# Altium PCB Wings_SMD_Breakout_v1.0.PcbDoc (part 1 of 2)
Units mil, origin at the board's own origin, x right, y up, seen from the top; angles counter-clockwise.
Board outline 2000 x 1181.1 mil, 2 copper layers (Top Layer, Bottom Layer), stack 61.756 mil thick; 50 components, 60 nets, 214 pads, 146 vias.
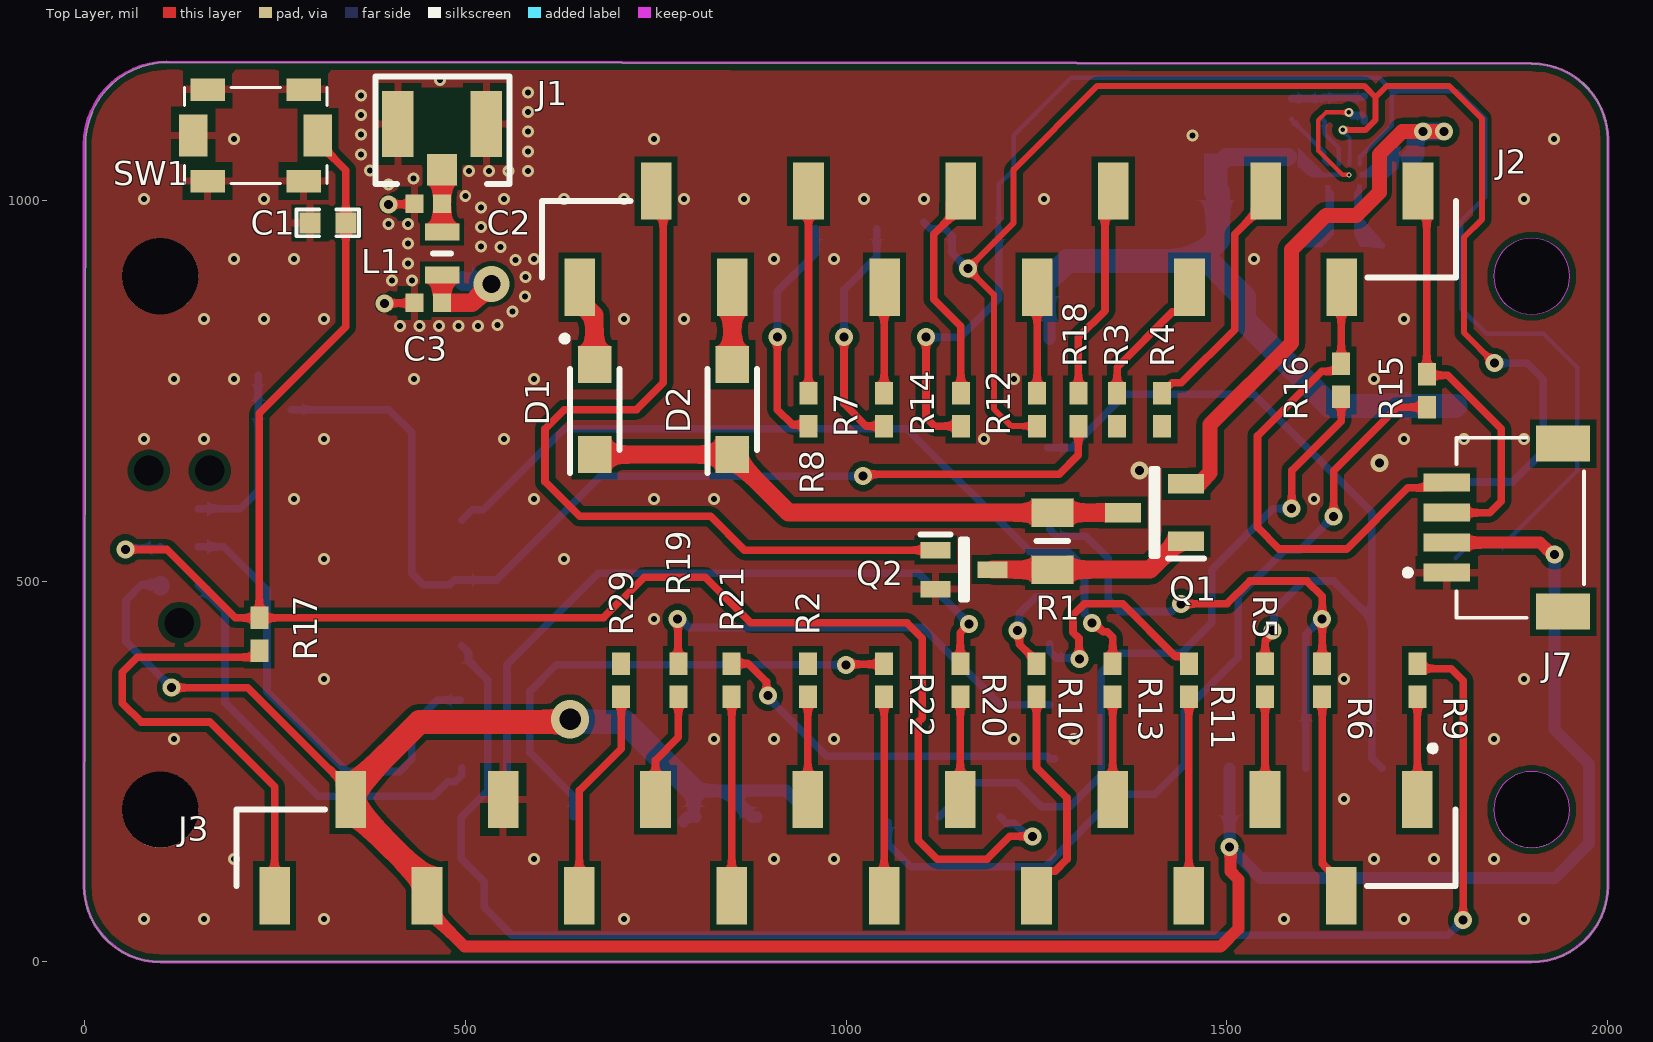
[diagram p0: Top Layer view]
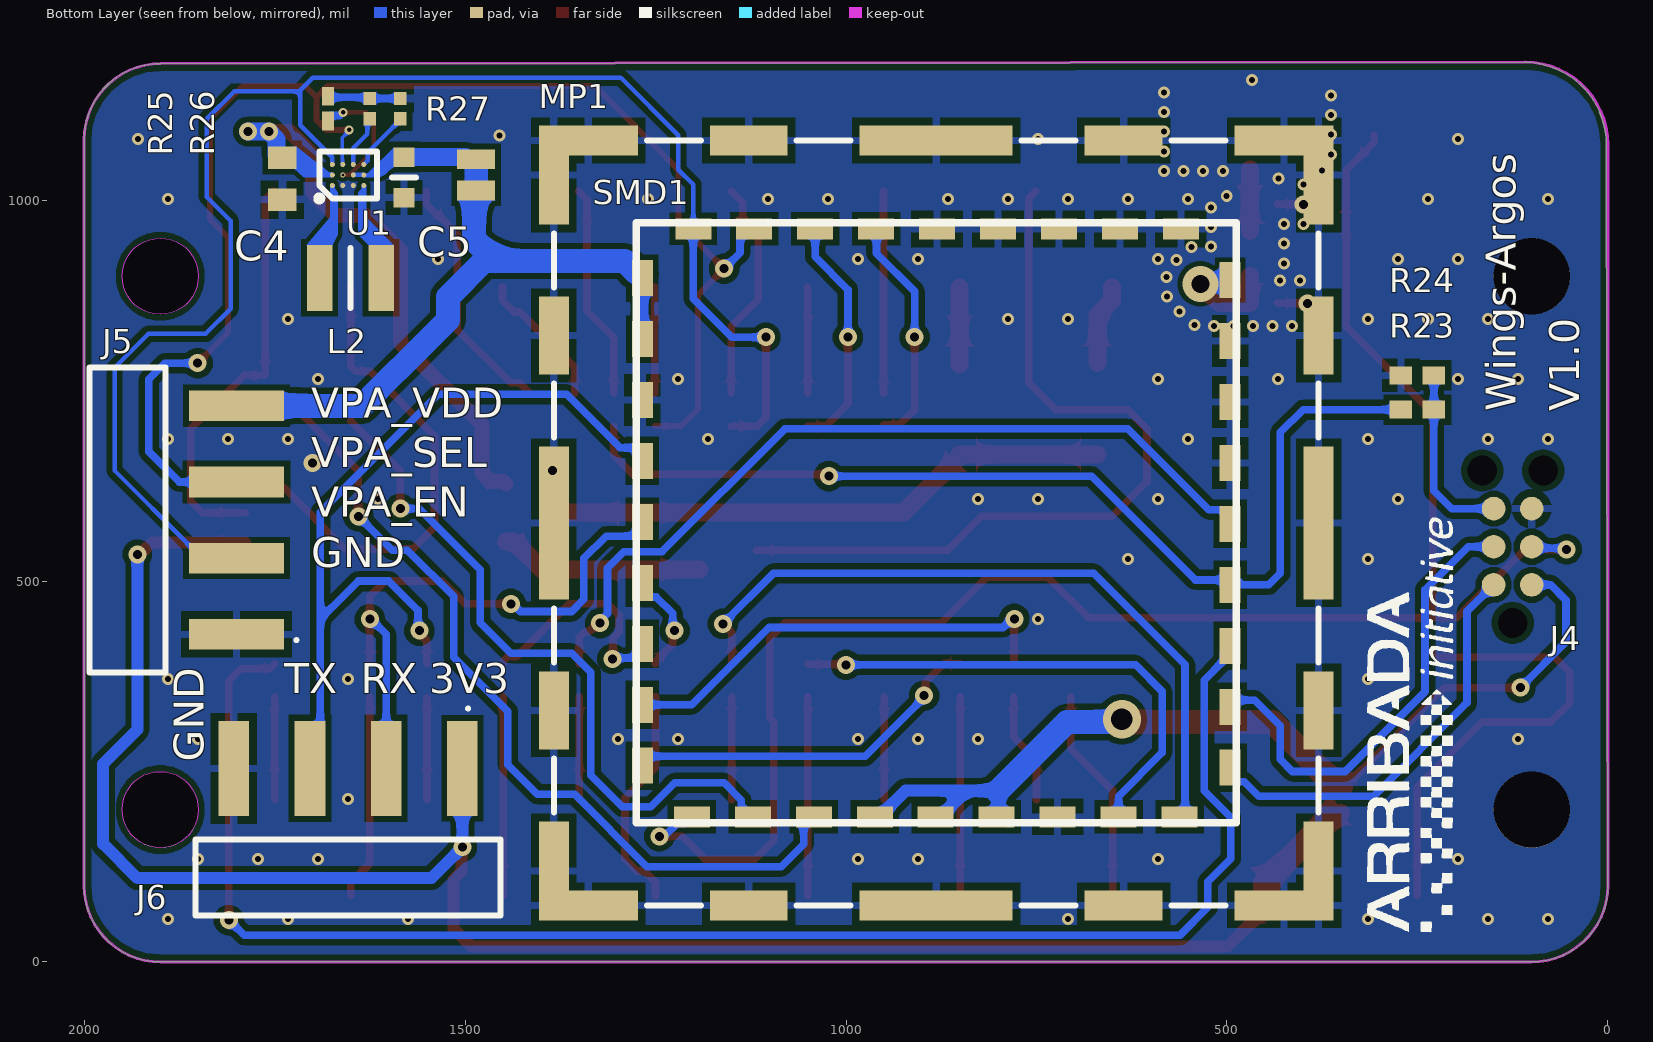
[diagram p1: Bottom Layer view, seen from below]
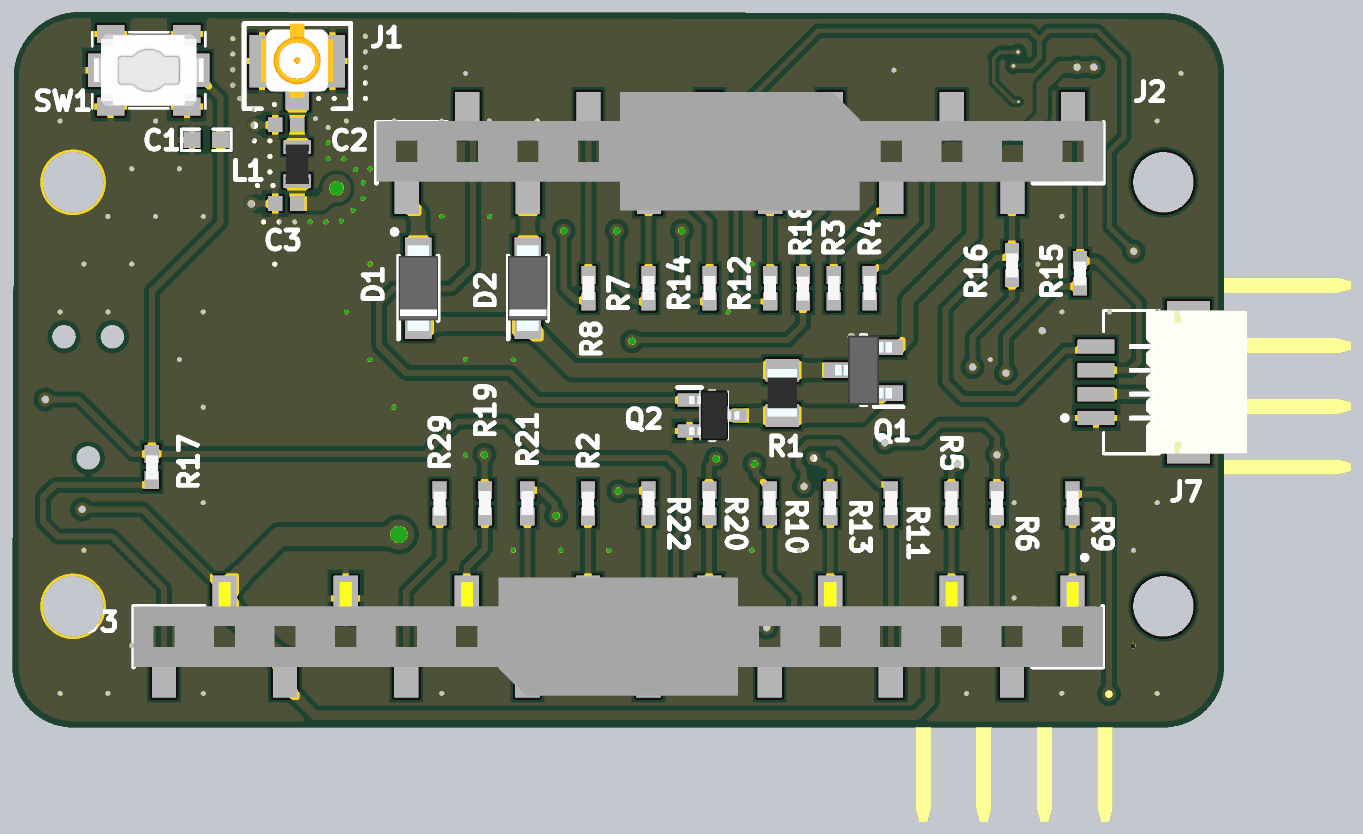
[diagram p2: 3D render of the assembled board from above, using the file's embedded part models]
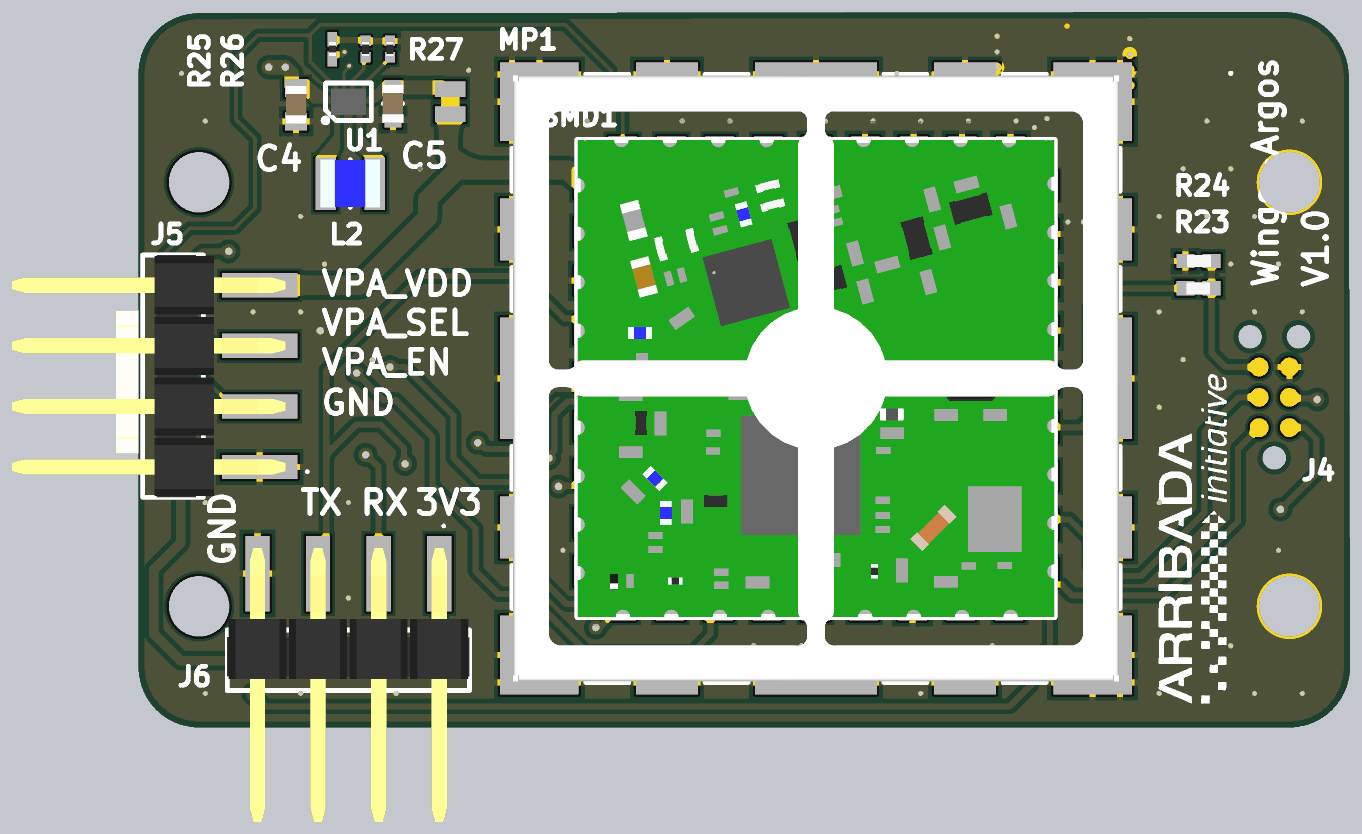
[diagram p3: 3D render of the assembled board from below, using the file's embedded part models]

## Layer stack, top to bottom
Top Solder: solder mask 1, SM-001, Dk 4
Top Layer: signal copper 1.378
Dielectric 1: core 59, Core-043, Dk 4.3
Bottom Layer: signal copper 1.378
Bottom Solder: solder mask 1, SM-001, Dk 4

## Board outline
100,0 cw(c100,100) 0,100 1.96,1072.68 cw(c110.38,1072.68) 110.38,1181.1 1900,1179.14 cw(c1900,1079.14) 2000,1079.14 2000,100 cw(c1900,100) 1900,0
cut-out: 1900,150 ccw(c1900,200) 1950,200 ccw(c1900,200) 1900,250 ccw(c1900,200) 1850,200 ccw(c1900,200)
cut-out: 1900,850 ccw(c1900,900) 1950,900 ccw(c1900,900) 1900,950 ccw(c1900,900) 1850,900 ccw(c1900,900)

## Design rules (kind name [scope] priority, off if disabled: settings)
AcuteAngle [All] p1: minimum=6.00000000000000E+0001 checktracksonly=FALSE
Clearance Clearance_1 [TouchesRoom('Room_opt') and InNet('VPA_VDD') vs TouchesRoom('Room_opt') and InNet('NetC5_1')] p1: gap=0 ignorepadtopadclearanceinfootprint=FALSE
Clearance Clearance_Pad_TPS [TouchesRoom('TPS63901')] p2: gap=5.91 ignorepadtopadclearanceinfootprint=FALSE except(10: Hole-Hole)
Clearance Clearance_RF [InNetClass('50Ohms')] p3: gap=5.91 ignorepadtopadclearanceinfootprint=FALSE
Clearance [All] p4: gap=7.87 ignorepadtopadclearanceinfootprint=FALSE except(5.91: Arc-SMDPad Track-SMDPad SMDPad-SMDPad THPad-THPad; 10: Hole-Hole)
MinimumSolderMaskSliver [All] p1: minsoldermaskwidth=3.94
PlaneClearance PlaneClearance_GND [InNet('GND')] p1: clearance=0
PlaneClearance [All] p2: clearance=20
PlaneConnect PlaneConnect_GND [InNet('GND')] p1: pad.planeconnectstyle=Relief pad.reliefexpansion=20 pad.reliefentries=4 pad.reliefconductorwidth=10 pad.reliefairgap=10 via.planeconnectstyle=Direct via.reliefexpansion=20 via.reliefentries=4 via.reliefconductorwidth=10 via.reliefairgap=10
PlaneConnect [All] p2: planeconnectstyle=Relief reliefexpansion=20 reliefentries=4 reliefconductorwidth=10 reliefairgap=10
PolygonConnect PolygonConnect_GND_TPS [(ObjectKind = 'Pad') And (Net = 'GND') And (Component = 'U1') vs InNet('GND')] p1: connectstyle=Direct reliefconductorwidth=10 reliefentries=4 polygonreliefangle="90 Angle" airgapwidth=10
PolygonConnect PolygonConnect_GND [InNet('GND') vs InNet('GND')] p2: thpad.connectstyle=Direct thpad.reliefconductorwidth=10 thpad.reliefentries=4 thpad.polygonreliefangle="90 Angle" thpad.airgapwidth=10 smdpad.connectstyle=Relief smdpad.reliefconductorwidth=10 smdpad.reliefentries=4 smdpad.polygonreliefangle="90 Angle" smdpad.airgapwidth=10 via.connectstyle=Direct via.reliefconductorwidth=10 via.reliefentries=4 via.polygonreliefangle="90 Angle" via.airgapwidth=10
PolygonConnect [All] p3: connectstyle=Relief reliefconductorwidth=10 reliefentries=4 polygonreliefangle="90 Angle" airgapwidth=10
RoomDefinition Room_opt [False vs False] p1: confinementstyle=ConfineIn formatcopy=TRUE lockcomponents=FALSE outline 1452.59,991.62 1518.33,991.62 1518.33,1074.36 1452.59,1074.36
RoomDefinition TPS63901 [False] p2: confinementstyle=ConfineIn formatcopy=TRUE lockcomponents=FALSE outline 1605,1005.43 1711.96,1005.43 1711.96,1075 1605,1075
RoutingPriority RoutingPWR [InNetClass('PWR')] p1: routingpriority=0
RoutingPriority RoutingDBG [InNetClass('UART')] p2: routingpriority=1
RoutingPriority RoutingSPI [All] p3: routingpriority=3
RoutingPriority RoutingI2C [All] p4: routingpriority=2
RoutingPriority RoutingDiGI [All] p5: routingpriority=5
RoutingPriority RoutingANALOG [All] p6: routingpriority=4
RoutingPriority RoutingALL [All] p7: routingpriority=6
RoutingVias [All] p1: holewidth=27.99 width=50 viastyle="Through Hole" minholewidth=11.81 minwidth=23.62 maxholewidth=28 maxwidth=50
ShortCircuit ShortCircuit_1 [TouchesRoom('Room_opt') and InNet('VPA_VDD') vs TouchesRoom('Room_opt') and InNet('NetC5_1')] p1: allowed=TRUE
ShortCircuit [All] p2: allowed=FALSE
SilkToSolderMaskClearance [IsPad] p1: minsilkscreentomaskgap=0 clearancetoexposedcopper=TRUE
SolderMaskExpansion SolderMaskExpansion_VIA_tented [(ObjectKind = 'Via')] p1: expansion=4 istentingtop=TRUE
SolderMaskExpansion [All] p2: expansion=4 istentingtop=FALSE
SupplyNets "Schematic Supply Nets_6" [InNet('VBAT')] p1: voltage=0.000
SupplyNets "Schematic Supply Nets_5" [InNet('GND')] p2: voltage=0.000
SupplyNets "Schematic Supply Nets_4" [InNet('VDD')] p3: voltage=0.000
SupplyNets "Schematic Supply Nets_2" [InNet('VPA_VDD')] p4: voltage=0.000
SupplyNets "Schematic Supply Nets_1" [InNet('F_3V3')] p5: voltage=0.000
SupplyNets "Schematic Supply Nets" [InNet('VBUS')] p6: voltage=0.000
Width Width_RF [InNetClass('50Ohms')] p1: maxlimit=31.5 minlimit=10 preferedwidth=23.62 minimp=50.000000 maximp=50.000000 favimp=50.000000
Width [All] p2: maxlimit=39.37 minlimit=3.94 preferedwidth=10 minimp=50.000000 maximp=50.000000 favimp=50.000000
24 further rules are at their usual default settings.

## Classes and differential pairs
net class 50Ohms: NetC2_2 NetC3_1
component class U_TPS63901: C4 C5 L2 R25 R26 R27 U1

## Components (designator, comment, footprint, x,y, rotation, side; value= is the part's Value field where it differs from the comment)
C1 "GRM155R71C104KA88D" 0402 295,970 r0 top value=100nF
C2 "NC" CAPC1005X55N 451.89,995 r0 top
C3 "CC0402BRNPO9BN3R6" CAPC1005X55N 451.89,865 r180 top value=3.6pF
C4 "GRM188R61A106MAALJ" CAPC1608X90N 1739.92,1028.07 r270 bottom value=10uF (schematic designator C1)
C5 "GRM188R61A226ME15D" GRM18x 1579.99,1029.85 r270 bottom value=22uF (schematic designator C2)
D1 "MBR120LSFT3G" SODFL3616X98N 670,725 r90 top
D2 "MBR120LSFT3G" SODFL3616X98N 850.79,725 r90 top
J1 "20279-001E-01" "MHF SMT REC" 470,1100 r270 top
J2 "SSM-112-F-SV-P-TR" SAMTEC_SSM-112-F-SV-P-TR 1200.79,948.67 r180 top
J3 "SSM-116-F-SV-P-TR" SAMTEC_SSM-116-F-SV-P-TR 1000,150 r0 top
J4 "TC2030-NL" TC2030NL 125,445 r90 bottom
J5 "M20-8890445R" M208890445R 2014.68,580 r90 bottom
J6 "M20-8890445R" M208890445R 1653.54,39.37 r0 bottom (schematic designator J7)
J7 "PRT-14417" SPARKFUN_PRT-14417 1885,570 r90 top (schematic designator J6)
L1 "LQW18AN18NG8ZD" LQW18AN10NG80D 470,930 r90 top value=18nH
L2 "DFE252012F-2R2M=P2" DFE2HCAH1R0MJ0L 1650.46,897.99 r180 bottom value=2.2uH (schematic designator L1)
MP1 "36103255S" 36103255S 881.57,576.31 r180 bottom
Q1 "DMG3415U-7" SOT96P240X120-3N 1405,589.8 r180 top
Q2 "BSS138BKW,115" SOT65P210X110-3N 1155,515 r0 top
R1 "RC0805JR07100KL" RESC2012X60N 1270.79,552.4 r270 top value=100kR
R2 "0R" RESC1005X40N 950,370 r270 top value=0mR
R3 "0R" RESC1005X40N 1355.79,725 r90 top value=0mR
R4 "0R" RESC1005X40N 1415,725 r90 top value=0mR
R5 "0R" RESC1005X40N 1550,370 r90 top value=0mR
R6 "0R" RESC1005X40N 1625,370 r90 top value=0mR
R7 "0R" RESC1005X40N 1050,725 r90 top value=0mR
R8 "0R" RESC1005X40N 950.79,725 r90 top value=0mR
R9 "0R" RESC1005X40N 1750,370 r90 top value=0mR (schematic designator R13)
R10 "0R" RESC1005X40N 1250,370 r90 top value=0mR (schematic designator R19)
R11 "0R" RESC1005X40N 1450,370 r90 top value=0mR (schematic designator R20)
R12 "0R" RESC1005X40N 1250.79,725 r90 top value=0mR (schematic designator R9)
R13 "0R" RESC1005X40N 1350,370 r90 top value=0mR (schematic designator R11)
R14 "0R" RESC1005X40N 1150.79,725 r90 top value=0mR (schematic designator R10)
R15 "0R" RESC1005X40N 1762.3,749.86 r270 top value=0mR (schematic designator R14)
R16 "0R" RESC1005X40N 1650,763.31 r270 top value=0mR
R17 "0R" RESC1005X40N 230,430 r270 top value=0mR
R18 "0R" RESC1005X40N 1305,725 r270 top value=0mR (schematic designator R12)
R19 "0R" RESC1005X40N 780,370 r90 top value=0mR (schematic designator R21)
R20 "0R" RESC1005X40N 1150,370 r90 top value=0mR (schematic designator R15)
R21 "0R" RESC1005X40N 850,370 r90 top value=0mR (schematic designator R22)
R22 "0R" RESC1005X40N 1050,370 r90 top value=0mR (schematic designator R18)
R23 "0R" RESC1005X40N 250,725 r0 bottom value=0mR
R24 "0R" RESC1005X40N 250,770 r180 bottom value=0mR
R25 "CRCW020136K5FNED" RESC0603X28N 1680,1120 r90 bottom value=36.5KR (schematic designator R1)
R26 "RC0201FR-070RL" RESC0603X26N 1625,1120 r90 bottom value=0R (schematic designator R2)
R27 "RC0201FR-070RL" RESC0603X26N 1585,1120 r90 bottom value=0R (schematic designator R3)
R29 "0R" RESC1005X40N 705,370 r270 top value=0mR (schematic designator R25)
SMD1 "stm32wl-SMD" stm32wl-SMD_noLegs 1275.28,182.6 r180 bottom
SW1 "PTS820J2x" TL1015 225,1085 r0 top
U1 "TPS63901YCJR" BGA12C35P3X4_111X146X35 1653.57,1032.99 r90 bottom

## Footprints (in the part's own frame and the unit in brackets; to place one, negate y for a bottom-side part, rotate by r counter-clockwise, add the part's x,y. Pads: shape width x height; smd on the part's side, far side on the other; paste and mask are expansions set on the pad)
0402 [mm]
  rect 0.7x0.7 smd: 1(0.035,0) 2(1.233,0)
  silkscreen extent -0.41,-0.45 1.67,0.45, body extent -0.38,-0.36 1.65,0.36, height 0.82
36103255S [mm] "Shielding Cabinet, SMD Frame, 25.4x25.4mm"
  rect 1x3.3 smd: 1(-12.75,-11.6) 1(-12.75,11.6) 1(12.75,-11.6) 1(12.75,11.6)
  rect 1x2.6 smd: 1(-12.75,-6.25) 1(-12.75,6.25) 1(12.75,-6.25) 1(12.75,6.25)
  rect 1x5.1 smd: 1(-12.75,0) 1(12.75,0)
  rect 3.3x1 smd: 1(-11.6,-12.75) 1(-11.6,12.75) 1(11.6,-12.75) 1(11.6,12.75)
  rect 2.6x1 smd: 1(-6.25,-12.75) 1(-6.25,12.75) 1(6.25,-12.75) 1(6.25,12.75)
  rect 5.1x1 smd: 1(0,-12.75) 1(0,12.75)
  silkscreen extent -12.75,-12.75 12.75,12.75, body extent -12.7,-12.7 12.7,12.7, height 3.2
BGA12C35P3X4_111X146X35 [mm]
  round 0.169 smd: A1(-0.35,0.525) A2(0,0.525) A3(0.35,0.525) B1(-0.35,0.175) B2(0,0.175) B3(0.35,0.175) C1(-0.35,-0.175) C2(0,-0.175) C3(0.35,-0.175) D1(-0.35,-0.525) D2(0,-0.525) D3(0.35,-0.525)
  silkscreen extent -0.88,-0.96 0.78,1.06, body extent -0.56,-0.73 0.56,0.73, height 0.35
CAPC1005X55N [mm]
  rect 0.6x0.62 smd: 1(-0.46,0) 2(0.46,0)
  body extent -0.5,-0.25 0.5,0.25, height 0.55
CAPC1608X90N [mm]
  rect 0.75x0.94 smd: 1(-0.7,0) 2(0.7,0)
  body extent -0.8,-0.45 0.8,0.45, height 0.8
DFE2HCAH1R0MJ0L [mm]
  rect 0.85x2.2 smd: 1(-1.025,0) 2(1.025,0)
  silkscreen extent 0,-1 0,1, body extent -1.25,-1 1.25,1, height 1.2
GRM18x [mm]
  rect 0.65x0.7 smd: 1(-0.675,0) 2(0.675,0)
  silkscreen extent 0,-0.4 0,0.4, body extent -0.8,-0.45 0.8,0.45, height 0.8
LQW18AN10NG80D [mm]
  rect 0.57x1.15 smd: 1(-0.715,0) 2(0.715,0)
  silkscreen extent 0,-0.3 0,0.3, body extent -0.82,-0.5 0.82,0.5, height 0.9
M208890445R [mm]
  rect 1.02x3.17 smd: 1(-3.81,-5.453) 2(-1.27,-5.453) 3(1.27,-5.453) 4(3.81,-5.453)
  silkscreen extent -5.08,-7.5 5.08,-0.55, body extent -5.08,-6.54 5.08,4.96, height 2.5
"MHF SMT REC" [mm]
  rect 1.05x1 smd: 1(1.525,0)
  rect 2.2x1.05 smd: 2(0,1.475) 3(0,-1.475)
  Top Layer pour cut-out: -1.2,0.95 1,0.95 1,-0.95 -1.2,-0.95
  silkscreen extent -1.58,-2.22 2,2.25, body extent -1.57,-1.5 1.53,1.5, height 1.27
RESC0603X26N [mm]
  rect 0.44x0.42 smd: 1(-0.34,0) 2(0.34,0)
  body extent -0.3,-0.15 0.3,0.15, height 0.26
RESC0603X28N [mm]
  rect 0.625x0.4 smd: 1(-0.412,0) 2(0.412,0)
  body extent -0.3,-0.15 0.3,0.15, height 0.28
RESC1005X40N [mm]
  rect 0.75x0.6 smd: 1(-0.55,0) 2(0.55,0)
  body extent -0.49,-0.25 0.51,0.25, height 0.35
RESC2012X60N [mm]
  rect 0.95x1.4 smd: 1(-0.95,0) 2(0.95,0)
  silkscreen extent 0,-0.53 0,0.53, body extent -1,-0.63 1,0.63, height 0.6
SAMTEC_SSM-112-F-SV-P-TR [mm]
  rect 1.02x1.905 smd: 01(13.97,1.603) 02(11.43,-1.603) 03(8.89,1.603) 04(6.35,-1.603) 05(3.81,1.603) 06(1.27,-1.603) 07(-1.27,1.603) 08(-3.81,-1.603) 09(-6.35,1.603) 10(-8.89,-1.603) 11(-11.43,1.603) 12(-13.97,-1.603)
  silkscreen extent -15.24,-1.27 15.24,3.41, body extent -15.24,-2.54 15.24,2.41, height 8.64
SAMTEC_SSM-116-F-SV-P-TR [mm]
  rect 1.02x1.905 smd: 01(19.05,1.603) 02(16.51,-1.603) 03(13.97,1.603) 04(11.43,-1.603) 05(8.89,1.603) 06(6.35,-1.603) 07(3.81,1.603) 08(1.27,-1.603) 09(-1.27,1.603) 10(-3.81,-1.603) 11(-6.35,1.603) 12(-8.89,-1.603) 13(-11.43,1.603) 14(-13.97,-1.603) 15(-16.51,1.603) 16(-19.05,-1.603)
  silkscreen extent -20.32,-1.27 20.32,3.41, body extent -20.32,-2.48 20.32,2.48, height 8.64
SODFL3616X98N [mm]
  rect 1.24x1.12 smd: 1(-1.5,0) 2(1.5,0)
  silkscreen extent -2.12,-0.82 1.35,0.82, body extent -1.8,-0.82 1.8,0.82, height 0.98
SOT65P210X110-3N [mm]
  rect 1x0.55 smd: 1(-0.95,0.65) 2(-0.95,-0.65) 3(0.95,0)
  silkscreen extent -1.45,-1 0.1,1.17, body extent -0.96,-1.05 1.14,1.05, height 0.93
SOT96P240X120-3N [mm]
  rect 1.2x0.65 smd: 1(-1.05,0.96) 2(-1.05,-0.96) 3(1.05,0)
  silkscreen extent -1.65,-1.45 0.1,1.54, body extent -1.2,-1.45 1.2,1.45, height 1.2
SPARKFUN_PRT-14417 [mm]
  rect 0.6x1.55 smd: 1(-1.5,2.45) 2(-0.5,2.45) 3(0.5,2.45) 4(1.5,2.45)
  rect 1.2x1.8 smd: S1(-2.8,-1.425) S2(2.8,-1.425)
  silkscreen extent -3,-2.12 3,3.85, body extent -3,-3.9 3,1.05, height 3.25
stm32wl-SMD_noLegs [mm]
  rect 0.7x1.2 smd: 0(0.2,1.905) 1(0.2,3.937) 2(0.2,5.969) 3(0.2,8.001) 4(0.2,10.033) 5(0.2,12.065) 6(0.2,14.097) 7(0.2,16.129) 8(0.2,18.161) 18(19.8,18.095) 19(19.8,16.063) 20(19.8,14.031) 21(19.8,11.999) 22(19.8,9.967) 23(19.8,7.935) 24(19.8,5.903) 25(19.8,3.871) 26(19.8,1.839)
  rect 1.2x0.7 smd: 9(1.9,19.8) 10(3.932,19.8) 11(5.964,19.8) 12(7.996,19.8) 13(10.028,19.8) 14(12.06,19.8) 15(14.092,19.8) 16(16.124,19.8) 17(18.156,19.8) 27(18.111,0.2) 28(16.079,0.2) 29(14.047,0.2) 30(12.015,0.2) 31(9.983,0.2) 32(7.951,0.2) 33(5.919,0.2) 34(3.887,0.2) 35(1.855,0.2)
  silkscreen extent 0,0 20,20, body extent 0,0 20,20, height 2.05
TC2030NL [mm]
  round 0.787 smd paste-0.787: 1(1.27,-0.635) 2(1.27,0.635) 3(2.54,-0.635) 4(2.54,0.635) 5(3.81,-0.635) 6(3.81,0.635)
  round 0.65 hole 0.991 unplated: H1(0,0) H2(5.08,1.016) H3(5.08,-1.016)
TL1015 [mm]
  rect 0.95x1.4 smd: 1(-2.075,0) 2(2.075,0)
  rect 1.15x0.75 smd: G1(-1.6,1.525) G2(1.6,1.525) G3(1.6,-1.525) G4(-1.6,-1.525)
  silkscreen extent -2.37,-1.6 2.37,1.6, body extent -2.3,-1.5 2.3,1.5, height 2

## Part data
C1: "Multilayer Ceramic Capacitors MLCC - SMD/SMT 0.1 uF 16 VDC 10% 0402 X7R", Capacitance=100nF, Case Code (Imperial)=0402, Case Code (Metric)=1005, Dielectric=X7R, Dielectric Material=Ceramic, Manufacturer=YAGEO, Manufacturer 1=Murata, Manufacturer_Part_Number=CC0402KRX7R7BB104, Max Operating Temperature=125°C, Min Operating Temperature=-55°C, Package=C0402, Package Quantity=1, Supplier Part Number 1=81-GRM155R71C104KA88, Tolerance=10%, Voltage=16V, Case/Package=0402, Category 1="Ceramic Capacitors", ComponentLink1Description=https://datasheet.ciiva.com/129/grm155r71c104ka88-01-129739.pdf?src-supplier=Digi-Key, ComponentLink1URL=https://datasheet.ciiva.com/129/grm155r71c104ka88-01-129739.pdf?src-supplier=Digi-Key, ComponentLink2Description=https://datasheet.ciiva.com/129/grm155r71c104ka88-01-129740.pdf?src-supplier=Digi-Key, ComponentLink2URL=https://datasheet.ciiva.com/129/grm155r71c104ka88-01-129740.pdf?src-supplier=Digi-Key, ComponentLink3Description=https://datasheet.ciiva.com/29199/454098-da-01-en-vs-kondensator-0402-29199799.pdf?src-supplier=Conrad, ComponentLink3URL=https://datasheet.ciiva.com/29199/454098-da-01-en-vs-kondensator-0402-29199799.pdf?src-supplier=Conrad, ComponentLink4Description=https://datasheet.ciiva.com/7937/4360-7937615.pdf?src-supplier=Element14, ComponentLink4URL=https://datasheet.ciiva.com/7937/4360-7937615.pdf?src-supplier=Element14, ComponentLink5Description=https://datasheet.ciiva.com/14116/grmseries-highdielectrictype-eng-14116878.pdf?src-supplier=Distrelec, ComponentLink5URL=https://datasheet.ciiva.com/14116/grmseries-highdielectrictype-eng-14116878.pdf?src-supplier=Distrelec, ComponentLink6Description=https://datasheet.ciiva.com/14103/grmseries-highdielectrictype-eng-14103750.pdf?src-supplier=Distrelec, ComponentLink6URL=https://datasheet.ciiva.com/14103/grmseries-highdielectrictype-eng-14103750.pdf?src-supplier=Distrelec, ComponentLink7Description=https://datasheet.ciiva.com/28534/4360-28534127.pdf?src-supplier=Element14, ComponentLink7URL=https://datasheet.ciiva.com/28534/4360-28534127.pdf?src-supplier=Element14, ComponentLink8Description=https://datasheet.ciiva.com/28534/4360-28534133.pdf?src-supplier=Element14, ComponentLink8URL=https://datasheet.ciiva.com/28534/4360-28534133.pdf?src-supplier=Element14, Depth=0.5mm, Description 1="0402 0.1 uF 16V ±10 % Tolerance X7R SMT Multilayer Ceramic Capacitor", Height=0.5mm, Lead Free="Lead Free", Length=1mm, Manufacturer Part Number 1=GRM155R71C104KA88D, Material=Ceramic, Mount="Surface Mount", Number of Pins=2, Packaging="Tape and Reel", Pricing 1="1=0,1, 10=0,017, 50=0,017, 100=0,01, 1000=0,008, 10000=0,005 (USD)", Radiation Hardening=No, Reach SVHC Compliant=Unknown, RoHS 1=Yes, RoHS Compliant=Yes, Series=GRM, Stock 1=7816691, Supplier 1=Mouser, Termination=SMD/SMT, Thickness=0.022inch, Voltage Rating=16V, Voltage Rating (DC)=16V, Width=0.02inch
C2: library part GEN_CAP_0402, "Generic capacitor", ComponentLink1Description=Mouser, ComponentLink1URL=https://www.mouser.fr/ProductDetail/Murata-Electronics/GCM1555C1H4R7CA16D?qs=jDWTHf1mkXZYnVNtgyfFgw%3D%3D
C3: "Multilayer Ceramic Capacitors MLCC - SMD/SMT 50 V 3.6pF C0G 0402 Tol 0.1pF", Manufacturer_Name=KEMET, Mouser Part Number=603-CC402BRNPO9BN3R6, Arrow Part Number=CC0402BRNPO9BN3R6, Arrow Price/Stock=https://www.arrow.com/en/products/cc0402brnpo9bn3r6/yageo, Datasheet Link=https://www.yageo.com/upload/media/product/productsearch/datasheet/mlcc/UPY-GP_NP0_16V-to-50V_18.pdf, Height=0.55mm, Manufacturer_Part_Number=CC0402BRNPO9BN3R6, Mouser Price/Stock=https://www.mouser.co.uk/ProductDetail/Yageo/CC0402BRNPO9BN3R6?qs=57cj7OiSijl%2FHGuB4N4%2Few%3D%3D
C4: "Multilayer Ceramic Capacitors MLCC - SMD/SMT 10 uF 10 VDC 20% 0603 X5R", Manufacturer_Name="Murata Electronics", Mouser Part Number=81-GRM188R61A106MALJ, Arrow Part Number=GRM188R61A106MAALJ, Arrow Price/Stock=https://www.arrow.com/en/products/grm188r61a106maalj/murata-manufacturing, Datasheet Link=https://psearch.en.murata.com/capacitor/product/GRM188R61A106MAAL%23.html, Height=0.9mm, Manufacturer_Part_Number=GRM188R61A106MAALJ, Mouser Price/Stock=https://www.mouser.co.uk/ProductDetail/Murata-Electronics/GRM188R61A106MAALJ?qs=hNud%2FORuBR0Lq8imX%2F1lYQ%3D%3D
C5: "Multilayer Ceramic Capacitors MLCC - SMD/SMT 22 uF 10 VDC 20% 0603 X5R", Manufacturer_Name="Murata Electronics", Mouser Part Number=81-GRM188R61A226ME5D, Arrow Part Number=GRM188R61A226ME15D, Arrow Price/Stock=https://www.arrow.com/en/products/grm188r61a226me15d/murata-manufacturing?region=nac, Datasheet Link=https://search.murata.co.jp/Ceramy/image/img/A01X/G101/ENG/GRM188R61A226ME15-02A.pdf, Height=0.8mm, Manufacturer_Part_Number=GRM188R61A226ME15D, Mouser Price/Stock=https://www.mouser.co.uk/ProductDetail/Murata-Electronics/GRM188R61A226ME15D?qs=eeBpzGFlv%252B8DV%2FrilzyhAw%3D%3D
D1 D2: "Schottky Diodes & Rectifiers 1A 20V", Manufacturer_Name=onsemi, Mouser Part Number=863-MBR120LSFT3G, Arrow Part Number=MBR120LSFT3G, Arrow Price/Stock=https://www.arrow.com/en/products/mbr120lsft3g/on-semiconductor?region=nac, Datasheet Link=http://www.onsemi.com/pub/Collateral/MBR120LSFT1-D.PDF, Height=0.98mm, Manufacturer_Part_Number=MBR120LSFT3G, Mouser Price/Stock=https://www.mouser.co.uk/ProductDetail/onsemi/MBR120LSFT3G?qs=3JMERSakebrl0QzFyBgvHg%3D%3D
J1: "CON IPEX MHF SMT RECEPTACLE RF DC - 6GHZ VSWR: 1.3 max. at 0.1-3GHz; VSWR: 1.5 max. at 3-6GHz", Frequency Range="DC - 6GHz", Manufacturer=Taoglas, Manufacturers Part Number=RECE-20279-001E-01, Supplier Part Number 1=931-1107-1-ND, Distributor 1=EBV, Distributor 2="Future Electronics", Size=MHF, Supplier 1=Digi-Key, Supplier 2=Mouser, Supplier Part Number 2=960-RECE20279001E01
J2: "Headers & Wire Housings Surface Mount, 12pos, PCB Socket Strips, .100\" pitch"
J3: "Headers & Wire Housings Surface Mount, 16pos,  PCB Socket Strips, .100\" pitch", Supplier Part Number 1=SSM-116-F-SV-P-ND, Supplier 1=Digi-Key, Supplier 2=Digi-Key, Supplier Part Number 2=SSM-116-F-SV-ND
J4: "CON PLUG OF NAILS 6 PIN FOOTPRINT NO LEGS", Manufacturer=Tag-Connect, Manufacturers Part Number="NOT FITTED PART", Distributor 1=EBV, Distributor 2="Future Electronics", Supplier Part Number 1="NOT FITTED PART", Supplier Part Number 2="NOT FITTED PART"
J5 J6: "Connector", Manufacturer_Name=Harwin, Mouser Part Number=855-M20-8890445R, Datasheet Link=https://cdn.harwin.com/pdfs/M20-889.pdf, Height=2.65mm, Manufacturer_Part_Number=M20-8890445R, Mouser Price/Stock=https://www.mouser.co.uk/ProductDetail/Harwin/M20-8890445R?qs=k41KVqW3ymoiw3ZBsQPrmw%3D%3D
J7: "QWIIC JST CONNECTOR - SMD 4-PIN", Package=None, Check_prices=https://www.snapeda.com/parts/PRT-14417/SparkFun+Electronics/view-part/?ref=eda, MF="SparkFun Electronics", MP=PRT-14417, SnapEDA_Link=https://www.snapeda.com/parts/PRT-14417/SparkFun+Electronics/view-part/?ref=snap
L1: "Inductor Wirewound , 18 nH, 75 Milliohm, ± 2%, 1.4 A, 0603 [1608 Metric]", Supplier Part Number 1=81-LQW18AN18NG8ZD, Supplier 1=Mouser
L2: "Inductor Power Chip Shielded Wirewound 2.2uH 20% 1MHz Metal 2.3A 0.082Ohm DCR 1008 T/R", Manufacturer=Murata, Manufacturer Part Number=DFE252012F-2R2M=P2, Supplier Part Number 1=81-DFE252012F-2R2MP2, Category="Fixed Inductors", ComponentLink1Description=http://www.farnell.com/datasheets/2616790.pdf?src-supplier=Farnell, ComponentLink1URL=http://www.farnell.com/datasheets/2616790.pdf?src-supplier=Farnell, ComponentLink2Description=https://www.murata.com/~/media/webrenewal/products/inductor/chip/tokoproducts/wirewoundmetalalloychiptype/m_dfe252012f.ashx?src-supplier=Digikey, ComponentLink2URL=https://www.murata.com/~/media/webrenewal/products/inductor/chip/tokoproducts/wirewoundmetalalloychiptype/m_dfe252012f.ashx?src-supplier=Digikey, ComponentLink3Description=https://datasheet.octopart.com/DFE252012F-2R2M%3DP2-Murata-datasheet-117010004.pdf?src-supplier=Future+Electronics, ComponentLink3URL=https://datasheet.octopart.com/DFE252012F-2R2M%3DP2-Murata-datasheet-117010004.pdf?src-supplier=Future+Electronics, ComponentLink4Description=https://datasheet.octopart.com/DFE252012F-2R2M%3DP2-Murata-datasheet-142691300.pdf?src-supplier=Arrow.cn, ComponentLink4URL=https://datasheet.octopart.com/DFE252012F-2R2M%3DP2-Murata-datasheet-142691300.pdf?src-supplier=Arrow.cn, Pricing 1="1=0,34, 10=0,221, 50=0,221, 100=0,208, 1000=0,208, 10000=0,176 (USD)", RoHS=Yes, Stock 1=84662, Supplier 1=Mouser
MP1: "WE-SHC Shielding Cabinet, SMT Frame, Tin Plated, Tray, 25x25x3mm", Manufacturer="Wurth Elektronik", Operating Temperature Max=125°C, Operating Temperature Min=-40°C, Base Material=Steel, Category="EMC Shielding", ComponentLink1Description="Website Link", ComponentLink1URL=https://www.we-online.com/redexpert/article/36103255S?ad, ComponentLink2Description="Datasheet Link", ComponentLink2URL=https://www.we-online.com/redexpert/spec/36103255S?ad, Height=3mm, Length=25mm, Manufacturer Part Number=36103255S, Match Code=WE-SHC, Mount="Surface Mount", Packaging=Tray, Plating="Tin Plated", type="SMT Frame", Width=25mm
Q1: "MOSFET (P-Channel) 16V Enh FET 8Vgss -12A 0.65W", Manufacturer_Name="Diodes Inc.", Mouser Part Number=621-DMG3415U-7, Arrow Part Number=DMG3415U-7, Arrow Price/Stock=https://www.arrow.com/en/products/dmg3415u-7/diodes-incorporated?region=nac, Datasheet Link=https://datasheet.datasheetarchive.com/originals/distributors/Datasheets-DGA23/1579852.pdf, Height=1.2mm, Manufacturer_Part_Number=DMG3415U-7, Mouser Price/Stock=https://www.mouser.co.uk/ProductDetail/Diodes-Incorporated/DMG3415U-7?qs=oUsD4qhOtFwqFLkI6WCRAA%3D%3D
Q2: "MOSFET (N-Channel)", Manufacturer_Name=Nexperia, Mouser Part Number=771-BSS138BKW115, Arrow Part Number=BSS138BKW,115, Arrow Price/Stock=https://www.arrow.com/en/products/bss138bkw115/nexperia?region=nac, Datasheet Link=https://assets.nexperia.com/documents/data-sheet/BSS138BKW.pdf, Height=1.1mm, Manufacturer_Part_Number=BSS138BKW,115, Mouser Price/Stock=https://www.mouser.co.uk/ProductDetail/Nexperia/BSS138BKW115?qs=A1cBxND5mHJ1Grk7RQmcgg%3D%3D
R1: "Thick Film Resistors - SMD 100 kOhms 125 mW 0805 5%", Manufacturer_Name=KEMET, Arrow Part Number=RC0805JR07100KL, Arrow Price/Stock=https://www.arrow.com/en/products/rc0805jr-07100kl/yageo?region=nac, Datasheet Link=https://www.yageo.com/upload/media/product/productsearch/datasheet/rchip/PYu-RC_Group_51_RoHS_L_11.pdf, Height=0.6mm, Manufacturer_Part_Number=RC0805JR07100KL
R2 R3 R4 R5 R6 R7 R8 R9 R10 R11 R12 R13 R14 R15 R16 R17 R18 R19 R20 R21 R22 R23 R24 R29: library part CRCW04020000Z0ED, "Thick Film Resistors  - SMD 0402 0.063 W 0 Ohm Jumper", Case Code (Imperial)=0402, Case Code (Metric)=1005, Manufacturer 1=Vishay, Max Operating Temperature=155°C, Max Power Dissipation=63mW, Min Operating Temperature=-55°C, Package Quantity=10000, Ratings=AEC-Q200, Resistance=0mR, Resistor Type="Thick Film", Supplier Part Number 1=541-0.0JCT-ND, Temperature Coefficient=100ppm/°C, Tolerance=5%, Voltage Rating=50V, Case/Package=0402, Category 1="Chip SMD Resistors", ComponentLink1Description=https://datasheet.ciiva.com/3255/dcrcwe3-3255944.pdf?src-supplier=Avnet, ComponentLink1URL=https://datasheet.ciiva.com/3255/dcrcwe3-3255944.pdf?src-supplier=Avnet, ComponentLink2Description=https://datasheet.ciiva.com/3255/dcrcwe3-3255945.pdf?src-supplier=Avnet, ComponentLink2URL=https://datasheet.ciiva.com/3255/dcrcwe3-3255945.pdf?src-supplier=Avnet, ComponentLink3Description=https://datasheet.ciiva.com/2461/dcrcwe3-2461962.pdf?src-supplier=Digi-Key, ComponentLink3URL=https://datasheet.ciiva.com/2461/dcrcwe3-2461962.pdf?src-supplier=Digi-Key, ComponentLink4Description=https://datasheet.ciiva.com/7841/1720486-7841802.pdf?src-supplier=Element14, ComponentLink4URL=https://datasheet.ciiva.com/7841/1720486-7841802.pdf?src-supplier=Element14, ComponentLink5Description=https://datasheet.ciiva.com/2461/dcrcwe3-2461964.pdf?src-supplier=Digi-Key, ComponentLink5URL=https://datasheet.ciiva.com/2461/dcrcwe3-2461964.pdf?src-supplier=Digi-Key, ComponentLink6Description=https://datasheet.ciiva.com/7841/1697337-7841468.pdf?src-supplier=Element14, ComponentLink6URL=https://datasheet.ciiva.com/7841/1697337-7841468.pdf?src-supplier=Element14, ComponentLink7Description=https://datasheet.ciiva.com/16761/70200976-16761309.pdf?src-supplier=Allied+Electronics, ComponentLink7URL=https://datasheet.ciiva.com/16761/70200976-16761309.pdf?src-supplier=Allied+Electronics, ComponentLink8Description=https://datasheet.ciiva.com/26311/fld-crcw-e3-data-en-26311550.pdf?src-supplier=Distrelec, ComponentLink8URL=https://datasheet.ciiva.com/26311/fld-crcw-e3-data-en-26311550.pdf?src-supplier=Distrelec, Construction=Rectangular, Contact Plating=Tin, Depth=0.5mm, Description 1="CRCW Series 0402 0.063 W 0 Ohm Jumper Surface Mount Thick Film Chip Resistor", Features="Automotive AEC-Q200", Height=0.35mm, Lead Free="Lead Free", Length=1mm, Manufacturer Part Number 1=CRCW04020000Z0ED, Military Standard=Not, Number of Terminations=2, Packaging="Tape and Reel", Power Rating=63mW, Pricing 1="1=0,1, 10=0,029, 25=0,0208, 50=0,016, 100=0,0118, 250=0,009, 500=0,0072, 1000=0,0053, 5000=0,0038 (USD)", Radiation Hardening=No, Reach SVHC Compliant=Unknown, RoHS 1=Yes, RoHS Compliant=Yes, Series=CRCW, Size Code=0402, Stock 1=170588, Supplier 1=Digi-Key, Termination=SMD/SMT, Voltage Rating (DC)=50V, Weight=2.3E-05oz, Width=0.5mm
R25: "Thick Film Resistors - SMD 36.5Kohm 1% 200ppm", Manufacturer_Name=Vishay, Datasheet Link=http://www.vishay.com/docs/20035/dcrcwe3.pdf, Height=0.28mm, Manufacturer_Part_Number=CRCW020136K5FNED
R26 R27: "Thick Film Resistors - SMD 0 Ohms 50mW 0201 1%", Manufacturer_Name=KEMET, Mouser Part Number=603-RC0201FR-070RL, Arrow Part Number=RC0201FR-070RL, Arrow Price/Stock=https://www.arrow.com/en/products/rc0201fr-070rl/yageo?region=nac, Datasheet Link=http://www.yageo.com/documents/recent/PYu-RC0201_51_RoHS_L_8.pdf, Height=0.26mm, Manufacturer_Part_Number=RC0201FR-070RL, Mouser Price/Stock=https://www.mouser.co.uk/ProductDetail/YAGEO/RC0201FR-070RL?qs=LWWr1WFOkdETHfAClQk8Xg%3D%3D
SMD1: "Arribada SMD module Argos comunication with PA GR5504"
SW1: "SW SPST PB 50MA 12V SMT CK variant", Manufacturer=C&K, Manufacturers Part Number="PTS820J2xM SMTR LFS", Supplier Part Number 1=611-PTS820J25MSMTR, Distributor 1=EBV, Distributor 2="Future Electronics", Supplier 1=Mouser, Supplier 2=Digi-Key, Supplier Part Number 2=CKN10505CT-ND
U1: "Integrated Circuit", Manufacturer_Name="Texas Instruments", Mouser Part Number=595-TPS63901YCJR, Arrow Part Number=TPS63901YCJR, Arrow Price/Stock=https://www.arrow.com/en/products/tps63901ycjr/texas-instruments?region=nac, Datasheet Link=https://www.ti.com/lit/ds/symlink/tps63901.pdf?ts=1658737279065&ref_url=https%253A%252F%252Fwww.ti.com%252Fproduct%252FTPS63901%253FkeyMatch%253DTPS63901YCJR%2526tisearch%253Dsearch-everything%2526usecase%253DOPN, Height=0.35mm, Manufacturer_Part_Number=TPS63901YCJR, Mouser Price/Stock=https://www.mouser.co.uk/ProductDetail/Texas-Instruments/TPS63901YCJR?qs=vvQtp7zwQdNZy3FE2e2hqg%3D%3D

## Free pads (board coordinates)
  rect 50x26 smd far side paste+0: 1(1485.46,1053.49) 2(1485.46,1012.49)
  round 100 hole 100 unplated: MH1(1900,900) MH2(1900,200) MH3(100,900) MH4(100,200)

## Via types
v1: diameter 15.75/15.75 (per signal layer), hole 7.87, Top Layer to Bottom Layer, tented both sides, 74 vias
v2: diameter 15.75, hole 7.87, Top Layer to Bottom Layer, tented both sides, 29 vias
v3: diameter 23.62, hole 11.81, Top Layer to Bottom Layer, tented both sides, 26 vias
v4: diameter 15.75, hole 7.87, Top Layer to Bottom Layer, tented top, 8 vias
v5: diameter 23.62, hole 11.81, Top Layer to Bottom Layer, tented top, 3 vias
v6: diameter 11.81, hole 5.91, Top Layer to Bottom Layer, tented both sides, 2 vias
v7: diameter 6.65, hole 3.94, Top Layer to Bottom Layer, tented both sides, 1 vias
v8: diameter 23.62, hole 11.81, Top Layer to Bottom Layer, tented bottom, 1 vias
v9: diameter 50, hole 27.99, Top Layer to Bottom Layer, tented bottom, 1 vias
v10: diameter 47.24, hole 23.62, Top Layer to Bottom Layer, tented bottom, 1 vias

## Nets (pads, with @x,y where several pads share a name; then routed paths per layer and width w, separated by ;. In a path a pad name is that pad's centre, name@x,y a point inside that pad or via, vN(x,y) a via of type N, cw(c..) or ccw(c..) an arc to the next point about the centre after c; other vN are vias at no path point)
A0: J3.12 R29.2 | length 284.2
  Top Layer w10: J3.12 650,225 705,280 R29.2
A1: J3.11 R19.1 | length 147.7
  Top Layer w10: J3.11 750,265 780,295 R19.1
A2: J3.10 R21.1 | length 261.4
  Top Layer w10: J3.10 R21.1
A3: J3.09 R2.2 | length 135.3
  Top Layer w10: J3.09 R2.2
D4: J3.01 R9.1 | length 135.3
  Top Layer w10: J3.01 R9.1
D5: J2.10 R4.2 | length 329
  Top Layer w10: R4.2 1428.35,760 1440,760 1510,830 1510,955 1534.26,979.26 1535.71,979.26 1550.79,994.34 J2.10
D6: J2.09 R3.2 | length 182.7
  Top Layer w10: R3.2 1355.79,780.79 1428.08,853.08 1435.71,853.08 1450.79,868.16 J2.09
D9: J2.08 R18.1 | length 284.1
  Top Layer w10: R18.1 1305,820 1340,855 1340,1000.97 J2.08
D10: J2.07 R12.2 | length 138.9
  Top Layer w10: R12.2 J2.07
D11: J2.06 R14.2 | length 294.8
  Top Layer w10: R14.2 1150.79,834.21 1115,870 1115,955 1135.71,975.71 1135.71,996.68 J2.06
D12: J2.05 R7.2 | length 139.3
  Top Layer w10: R7.2 1050,884.79 J2.05
D13: J2.04 R8.2 | length 265.1
  Top Layer w10: R8.2 J2.04
D24: J3.08 R22.1 | length 261.4
  Top Layer w10: J3.08 R22.1
D25: J3.07 R20.1 | length 135.3
  Top Layer w10: J3.07 R20.1
DBG_RF-BUSY: R20.2 SMD1.27 | length 943
  Top Layer w10: R20.2 1150,432.16 v3(1161.51,443.67)
  Bottom Layer w10: SMD1.27 555,197.72 555,390 675,510 1095.18,510 v3(1161.51,443.67)
DBG_RF-NRST: R22.2 SMD1.28 | length 668.4
  Top Layer w10: v3(1000,390) 1000.83,390.83 1049.17,390.83 R22.2
  Bottom Layer w10: SMD1.28 642.24,217.76 585,275 585,355 620,390 v3(1000,390)
DBG_SWCLK: J4.4 SMD1.25 | length 608.4
  Bottom Layer w10: J4.4 183.37,545 240,488.37 240,355 345,250 414.14,250 430,265.86 430,310 463.69,343.69 SMD1.25@493.43,343.69
DBG_SWDIO: J4.2 SMD1.26 | length 552.2
  Bottom Layer w10: J4.2 185,460 185,340 307.39,217.61 458.37,217.61 477.13,236.37 486.97,236.37 495.75,245.14 SMD1.26
DBG_SWO: R18.2 R23.2 SMD1.23 | length 1345.5
  Top Layer w10: v8(1022.61,637.61) 1030.28,637.61 1032.67,640 1279.61,640 1305,665.39 R18.2
  Bottom Layer w10: R23.2 400,725 430,695 430,510 445,495 480,495 486.4,501.4 541.4,501.4 677.61,637.61 v8(1022.61,637.61)
EN: J2.02 Q2.1 | length 1054.8
  Top Layer w10: J2.02 760,1002.55 760,760 725,725 630,725 605,700 605,630.37 650.37,585 822.36,585 866.77,540.59 Q2.1
F_3V3: J3.14 J3.15 J4.1 J6.1 J7.2 SMD1.30 SMD1.31 SMD1.32 | length 3811.7
  Top Layer w10: v3(115,360) 215,360 J3.15@335,240 ; v3@1926.31,535 v3(1930,535)
  Top Layer w15.75: J3.14@450,69.49 499.49,20 1491.47,20 1515,43.53 1515,108.57 1504.8,118.77 1504.8,149.33 v3(1503.5,150.63) ; J7.2 1911,550.32 v3@1926.31,535
  Top Layer w23.62: J3.15@350,195.67 358.27,187.4 J3.15@366.93,187.4
  Top Layer w31.5: J3.15@350,230.51 354.33,234.84 359.84,234.84 440,315 634.34,315 v9(637.87,318.54) ; J3.15@366.93,187.4 450,104.33 J3.14 J3.14@450,69.49
  Bottom Layer w10: J4.1 75,495 55,475 55,420 v3(115,360) ; J6.1@1503.33,253.84 J6.1
  Bottom Layer w15.75: SMD1.30@786.5,184.57 792.4,190.47 SMD1.30@801.97,190.47 ; SMD1.30 SMD1.30@801.97,190.47 ; SMD1.31 876.34,190.47 841.81,225 ; SMD1.32 956.34,190.47 921.81,225 841.81,225 ; J6.1@1503.33,253.84 1503.52,253.65 v3(1503.5,150.63) 1544.12,110 1930,110 1975,155 1975,260 1930,305 v3(1930,535) ; SMD1.30@801.97,190.47 800,192.44 800,225 841.81,225
  Bottom Layer w23.62: J4.1@100,493.01 J4.1
  Bottom Layer w31.5: v9(637.87,318.54) 641.41,315 710,315 800,225
F_MISO: J3.04 R11.1 | length 261.4
  Top Layer w10: J3.04 R11.1
F_MOSI: J3.05 R13.1 | length 135.3
  Top Layer w10: J3.05 R13.1
F_NRST: J3.16 R17.2 | length 621.1
  Top Layer w10: R17.2 230,406.81 223.19,400 70,400 50.29,380.29 50.29,339.71 75,315 165,315 250,230 J3.16
F_RX: J3.03 R5.1 | length 133.9
  Top Layer w10: J3.03 R5.1@1550,346.98
F_SCK: J3.06 R10.1 | length 300
  Top Layer w10: J3.06 1250,104.33 1265.08,119.41 1274.41,119.41 1290,135 1290,215.76 1250,255.76 R10.1
F_TX: J3.02 R6.1 | length 271.8
  Top Layer w10: R6.1 1625,129.33 1650,104.33 J3.02
GND: C1.1 C2.1 C3.2 C4.2 C5.2 J1.2 J1.3 J3.13 J4.5 J5.1 J6.4 J7.1 MP1.1 pad.MH3 pad.MH4 Q2.2 R24.1 R25.2 R26.2 R27.2 SMD1.6 SMD1.13 SMD1.14 SMD1.15 SMD1.16 SMD1.17 SMD1.19 SMD1.20 SMD1.21 SMD1.29 SW1.1 SW1.G1 SW1.G2 SW1.G3 SW1.G4 U1.B1 U1.C1 | length 170.8
  Top Layer w10: v5(394.31,864.34) 394.64,864.67 433.45,864.67 C3.2 ; v5(399.29,994.08) 399.75,994.54 433.32,994.54 C2.1
  Bottom Layer w10: R27.2 R26.2 1626.42,1134.8 1678.58,1134.8 R25.2
  other v1: 78.74,56.22 157.48,56.22 314.96,56.22 708.66,56.22 1574.8,56.22 1732.28,56.22 1889.76,56.22 196.85,134.96 590.55,134.96 905.51,134.96 984.25,134.96 1692.91,134.96 1771.65,134.96 1850.39,134.96 1653.54,213.7 118.11,292.44 826.77,292.44 905.51,292.44 984.25,292.44 1220.47,292.44 1299.21,292.44 1850.39,292.44 314.96,371.18 1653.54,371.18 1889.76,371.18 748.03,449.92 314.96,528.66 629.92,528.66 275.59,607.4 590.55,607.4 748.03,607.4 826.77,607.4 1614.17,607.4 78.74,686.14 157.48,686.14 314.96,686.14 551.18,686.14 1181.1,686.14 1732.28,686.14 1811.02,686.14 1889.76,686.14 118.11,764.88 196.85,764.88 433.07,764.88 590.55,764.88 1220.47,764.88 1692.91,764.88 157.48,843.62 236.22,843.62 314.96,843.62 708.66,843.62 787.4,843.62 1732.28,843.62 196.85,922.36 275.59,922.36 590.55,922.36 905.51,922.36 984.25,922.36 1535.43,922.36 78.74,1001.1 236.22,1001.1 551.18,1001.1 629.92,1001.1 708.66,1001.1 787.4,1001.1 866.14,1001.1 1023.62,1001.1 1102.36,1001.1 1259.84,1001.1 1889.76,1001.1 196.85,1079.84 748.03,1079.84 1929.13,1079.84 1455,1085
  other v2: 414.47,834.58 440.16,834.58 465.85,834.58 491.53,834.58 517.22,834.58 542.91,836.34 561.98,853.63 578.38,873.49 404.36,894.66 430.05,894.66 579.39,899.22 424.98,917.02 566.18,921.32 546.77,938.23 521.04,939.17 424.98,942.7 521.04,964.86 424.98,968.39 521.04,990.55 500.27,1005.11 432.44,1028.22 505.48,1038.31 531.17,1038.31 556.86,1038.31 582.55,1038.31 582.55,1115.37 363.6,1137.21 582.55,1141.06 467.17,1157.85
  other v3: 1700,655
  other v4: 399.29,968.39 399.75,1020.23 375.09,1038.56 363.6,1060.15 582.55,1063.99 363.6,1085.83 582.55,1089.68 363.6,1111.52
  other v5: 1385,645
I2C_SCL: R16.2 SMD1.34 | length 953.9
  Top Layer w10: v3(1585,595) 1585,645 1650,710 R16.2
  Bottom Layer w10: SMD1.34 1137.25,205.48 1137.25,212.25 1160,235 1225,235 1256.35,203.65 1293.65,203.65 1335,245 1335,380 1360,405 1440,405 1480,445 1480,515 1560,595 v3(1585,595)
I2C_SDA: R15.2 SMD1.33 | length 1120.5
  Top Layer w10: v3(1640,585) 1640,644.63 1723.58,728.21 R15.2
  Bottom Layer w10: SMD1.33@1055.67,183.43 1055.67,154.33 1085,125 1261.23,125 1356.23,220 1405,220 1443.79,258.79 1443.79,328.79 1515,400 1515,480 1575.62,540.62 1595.62,540.62 v3(1640,585)
LPUART_RX: J6.2 R6.2 SMD1.4 | length 759.5
  Top Layer w10: v3(1440,470) 1500,470 1530,500 1605,500 1625,480 v3(1625,450) R6.2
  Bottom Layer w10: SMD1.4 1267.4,567.76 1276.18,558.98 1314.76,558.98 1344.07,529.66 1344.07,475.93 1360,460 1427.33,460 1437.33,470 v3(1440,470) ; J6.2 1603.54,429.86 1620,446.31 v3@1620,450
LPUART_TX: J6.3 R5.2 SMD1.5 | length 1099.5
  Top Layer w10: R5.2 1550.1,391.76 1550.1,421.42 1560,431.31 v3(1560,435)
  Bottom Layer w10: SMD1.5@1265,675 1296.6,675 1366.6,745 1535,745 1690,590 1690,450 ; v3(1560,435) 1561.81,436.81 1561.81,461.81 1600,500 1640,500 1690,450 ; J6.3 1690,267.6 1690,450
NetC2_2: C2.2 J1.1 L1.2 | length 80.8
  Top Layer w23.62: L1.2@470,959.15 C2.2 J1.1
NetC3_1: C3.1 L1.1 SMD1.18 | length 152.2
  Top Layer w23.62: L1.1@470,900.24 C3.1 508.98,865 533.98,890 v10(535,890)
  Bottom Layer w23.62: SMD1.18 495.75,894.46 497.72,892.49 532.51,892.49 v10(535,890)
NetC5_1: C5.1 pad.1 U1.C2 U1.D2 | length 102.2
  Bottom Layer w5.91: U1.D2 U1.C2
  Bottom Layer w23.62: pad.1@1493.91,1050.88 1499.45,1056.42 C5.1
NetD1_1: D1.1 D2.1 Q1.3 R1.1 | length 726.6
  Top Layer w23.62: D1.1@670,666 850.79,666 D2.1 850.79,663.58 924.57,589.8 R1.1 Q1.3
NetJ4_6: J4.6 R23.1 R24.2 | length 239.7
  Bottom Layer w10: J4.6 205,595 228.35,618.35 R23.1 R24.2
NetL2_1: L2.1 U1.A1
NetL2_2: L2.2 U1.D1
NetQ1_1: Q1.1 Q2.3 R1.2 | length 269.3
  Top Layer w23.62: Q2.3 R1.2 1398.99,515 1436,552.01 Q1.1
NetR7_1: R7.1 SMD1.11 | length 312.1
  Top Layer w10: v3@997.43,816.57 997.43,732.57 1026.65,703.35 R7.1
  Bottom Layer w10: v3@997.43,816.57 v3(997.43,820) 997.43,882.43 1040.48,925.48 SMD1.11
NetR8_1: R8.1 SMD1.12 | length 307.2
  Top Layer w10: v3(910,820) 910,725 929.83,705.17 949.83,705.17 R8.1@950.79,704.21
  Bottom Layer w10: v3(910,820) 910,880 960,930 SMD1.12@960,962.13
NetR19_2: R19.2 SMD1.1 | length 594.2
  Top Layer w10: v3(778.99,450.3) 779.49,449.79 779.49,392.16 R19.2
  Bottom Layer w10: v3(778.99,450.3) 782.67,450.3 793.92,439.05 1100.95,439.05 1202.39,337.61 SMD1.1
NetR21_2: R21.2 SMD1.0 | length 486.4
  Top Layer w10: R21.2 871.85,391.65 895.63,367.87 895.63,351.42 v3(897.35,349.7)
  Bottom Layer w10: v3(897.35,349.7) 897.35,347.65 975,270 1264.3,270 1267.4,266.9 SMD1.0@1273.86,266.9
NetR25_1: R25.1 U1.B2 | length 165.1
  Top Layer w5.91: v6(1660,1115) 1630,1115 1620,1105 1620,1065 1652.01,1032.99 v7(1660.46,1032.99)
  Bottom Layer w10: v6(1660,1115) 1660.49,1115 1664.41,1111.08 1677.13,1111.08 1680,1108.21 R25.1
NetR26_1: R26.1 U1.C3 | length 68.8
  Bottom Layer w5.91: R26.1 1628.04,1103.58 1628.04,1086.96 1646.68,1068.32 U1.C3
NetR27_1: R27.1 U1.D3 | length 80.4
  Bottom Layer w5.91: R27.1 1584.19,1105.81 1627.96,1062.04 1627.96,1051.71 U1.D3
NRST: C1.2 J4.3 R17.1 SMD1.35 SW1.2 | length 2374.2
  Top Layer w10: v3(54.25,541.46) 108.54,541.46 198.35,451.65 R17.1 ; SW1.2 306.69,1076.14 343.54,1039.29 C1.2 343.54,833.54 230,720 R17.1 ; v3(1245,165) 1215,165 1185,135 1120,135 1095,160 1095,315 1100,320 1100,425 1080,445 875,445 815,505 735,505 681.65,451.65 R17.1
  Bottom Layer w10: v3(54.25,541.46) 56.02,543.23 98.23,543.23 J4.3 ; SMD1.35 1211.02,181.69 1221.59,181.69 1235.68,167.61 1242.39,167.61 v3(1245,165)
SCL: J2.11 J7.4 R16.1 | length 668.2
  Top Layer w10: J2.11 1650,884.79 R16.1 1650,782.01 1643.19,775.2 1624.45,775.2 1540.15,690.9 1540.15,570.45 1568.63,541.98 1656.98,541.98 1737.24,622.24 1781.73,622.24 J7.4
SDA: J2.12 J7.3 R15.1 | length 545.1
  Top Layer w10: J2.12 1762.3,1000.25 R15.1 1763.82,770 1790,770 1860,700 1860,605 1844.68,589.68 J7.3
SPI_MISO: R11.2 SMD1.2 | length 306.2
  Top Layer w10: v3(1306.64,397.89) 1305.79,398.74 1305.79,424.7 1297.89,432.6 1297.89,454.88 1313.02,470 1363.04,470 1431.8,401.24 1443.19,401.24 1450,394.43 R11.2
  Bottom Layer w10: SMD1.2 1267.4,407.76 1276.18,398.98 1305.55,398.98 v3(1306.64,397.89)
SPI_MOSI: R13.2 SMD1.22 | length 1089.1
  Top Layer w10: v3(1322.58,444.65) 1326.26,444.65 1337.53,433.38 1342.93,433.38 1350,426.31 R13.2
  Bottom Layer w10: SMD1.22@495.48,579.65 509.46,593.62 523.62,593.62 630,700 1080,700 1241.54,538.46 1291.44,538.46 1313.07,516.82 1313.07,457.32 1322.58,447.81 v3(1322.58,444.65)
SPI_NSS: R9.2 SMD1.24 | length 2076.4
  Top Layer w10: R9.2 1756.65,385 1794.14,385 1810,369.14 v3(1810,55)
  Bottom Layer w10: SMD1.24 504.53,406.21 504.53,395.47 530,370 530,225 495,190 495,135.48 525,105.48 525,71.63 561.63,35 1790,35 v3(1810,55)
SPI_SCK: R10.2 SMD1.3 | length 127.1
  Top Layer w10: v3(1225,435) 1227.61,432.39 1227.61,417 1250,394.61 R10.2
  Bottom Layer w10: v3(1225,435) 1227.61,437.61 1227.61,457.61 1248.99,478.99 SMD1.3@1268.46,478.99
VBAT: D1.2 J2.01 | length 107.1
  Top Layer w23.62: J2.01 650.79,868.16 670,848.95 D1.2@670,786.42
VBUS: D2.2 J2.03 | length 101.5
  Top Layer w23.62: D2.2 J2.03
VDD: C4.1 Q1.2 U1.A2 | length 739.7
  Top Layer w19.68: Q1.2 1449.29,630.55 1466.3,630.55 1477.83,642.08 1477.83,705.29 1585,812.45 1585,935 1630,980 1670,980 1700,1010 1700,1060 1730,1090 v3(1785,1090)
  Bottom Layer w23.62: C4.1 1743.66,1055.63 1747.15,1059.12 1747.15,1079.72 v3(1757.44,1090) v3(1785,1090)
VPA_EN: J5.2 R14.1 SMD1.9 U1.A3 | length 2070.5
  Top Layer w10: v3(1105,820) 1105,715 1116.65,703.35 R14.1
  Bottom Layer w5.91: SMD1.9 1200.48,1020.48 1220,1040 1220,1085 1295.42,1160.42 1700,1160.42 1716.26,1144.16 1716.26,1142.57 ; U1.A3 1674.24,1056.25 1716.26,1098.27 1716.26,1142.57 ; J5.2 1817.13,547.13 1862.13,547.13 1960,645 1960,780 1915.58,824.42 1840.58,824.42 1807.64,857.36 1807.64,972.64 1838.99,1003.99 1838.99,1106.65 1803.07,1142.57 1716.26,1142.57
  Bottom Layer w10: v3(1105,820) 1150,820 1200.48,870.48 SMD1.9
VPA_PGOOD: J5.3 R12.1 SMD1.10 U1.B3 | length 1980.4
  Top Layer w7.87: R12.1 1216.65,703.35 1194.17,725.83 1194.17,875.83 v3(1160,910) 1220,970 1220,1040 1330,1150 1680,1150 1694.73,1135.27 1695.27,1135.27 ; v6(1652.13,1092.13) 1682.13,1092.13 1695.27,1105.27 1695.27,1135.27 ; v3(1851.06,785.96) 1811.06,825.97 1811.06,951.06 1835,975 1835,1106.44 1791.44,1150 1710,1150 1695.27,1135.27
  Bottom Layer w4.72: v6@1652.13,1090.53 1660.98,1081.68 1660.98,1047.81 1660.6,1047.44 U1.B3@1660.6,1047.11 ; U1.B3 U1.B3@1660.46,1046.97
  Bottom Layer w5.91: v6@1652.13,1090.53 v6(1652.13,1092.13) ; U1.B3@1660.46,1046.97 U1.B3@1660.6,1047.11
  Bottom Layer w10: SMD1.10@1101.86,970.92 1110.64,962.14 SMD1.10 1130.32,962.13 1139.1,953.35 1139.1,930.9 v3(1160,910) ; J5.3 1875,630 1915,670 1915,765 1894.04,785.96 v3(1851.06,785.96)
VPA_VDD: J5.4 pad.2 SMD1.7 SMD1.8 | length 826.7
  Bottom Layer w15.75: SMD1.7 SMD1.8
  Bottom Layer w23.62: SMD1.8 SMD1.8@1269.37,899.58 ; SMD1.8@1269.37,905.49 SMD1.8@1276.34,905.49
  Bottom Layer w31.5: SMD1.8@1269.37,899.58 SMD1.8@1269.37,905.49 ; SMD1.8@1276.34,905.49 1290.85,920 1460.23,920 ; pad.2 1488.07,1009.88 1488.07,947.85 1460.23,920 ; J5.4 1635.25,730 1587.75,777.5 1587.48,777.5 1522.5,842.48 1522.5,872.5 1475,920 1460.23,920
pads on no net: J4.H1 J4.H2 J4.H3 J7.S1 J7.S2 R2.1 R3.1 R4.1 R29.1

## Polygon pours and split planes (outlines as drawn)
GND on Bottom Layer "GND_L02_P001" (solid, remove dead copper, pour order 1): 0,0 5,-5 2005,-5 2005,1185 2000,1190 0,1190
GND on Top Layer "GND_L01_P000" (solid, remove dead copper, pour order 0): 0,0 5,-5 2005,-5 2005,1185 2000,1190 0,1190

## Keep-outs
Keep-Out Layer:
  lines w3.94: 2000,1079.14 ccw(c1900,1079.14) 1900,1179.14 108.43,1181.1 ccw(c108.43,1072.68) 0,1072.68 0,100 ; 2000,1080 2000,100 ; 0,100 ccw(c100,100) 100,0 ; 0,100 ccw(c100,100) 100,0 ; 100,0 1900,0 ; 100,0 1900,0 ; 1900,0 ccw(c1900,100) 2000,100 ; 1900,0 ccw(c1900,100) 2000,100

## Other copper
Bottom Layer:
  region net NetL2_2: 1629.89,1019.29 1629.89,977.18 1593.49,940.78 1596.38,937.88 1624.92,937.88 1624.92,939.33 1640,954.41 1640,1010 1636.69,1013.82 1635.72,1015.48 1635.72,1019.64
  region net NetL2_1: 1677.13,1019.83 1677.13,977.72 1707.58,941.31 1706.71,935.95 1682.09,938.42 1675.19,938.88 1667.01,954.95 1667.01,1010.54 1670.32,1014.36 1671.29,1016.02 1671.29,1020.18
  region net NetC5_1: 1632.58,1030.19 1612.18,1030.19 1605.46,1032.99 1600.14,1038.31 1592.8,1044.03 1593.42,1068.86 1627.99,1035.46 1632.76,1035.46
  region net VDD: 1674.34,1029.76 1674.64,1029.76 1711.52,1029.76 1724.79,1041.56 1728.02,1070.27 1720.76,1070.27 1700.83,1053.67 1685.58,1042.62 1679.28,1037.14 1677.27,1036.22 1673.99,1036.22
  region net VPA_VDD: 1470.46,1060.74 1470.46,1031.74 1500.46,1031.74 1500.46,1060.74
  region net VPA_VDD: 1470.46,1034.24 1470.46,1005.24 1500.46,1005.24 1500.46,1034.24

## Silkscreen, mask and mechanical layers (free items; w line width, h text height)
Bottom Overlay:
  drawing of 46 lines, arcs and shapes, not listed
  text "V1.0" at 37.87,722.87 h39.37 r270
  text "Wings-Argos" at 120.99,722.87 h39.37 r270
  text "VPA_VDD" at 1702.13,714.43 h39.37
  text "VPA_SEL" at 1702.13,649.43 h39.37
  text "VPA_EN" at 1702.13,584.43 h39.37
  text "GND" at 1702.13,517.87 h39.37
  text "3V3" at 1547.13,352.87 h39.37
  text "RX" at 1637.13,352.87 h39.37
  text "TX" at 1737.13,352.87 h39.37
  text "GND" at 1842.87,262.87 h39.37 r270
Bottom Solder:
  region: 1470,1043.05 1470,1023.05 1500,1023.05 1500,1043.05
Mechanical 1:
  drawing of 243 lines, arcs and shapes, not listed
  text "Layer" at 2457.5,1117.5 h60
  text "Name" at 2867.41,1117.5 h60
  text "Material" at 4197.03,1117.5 h60
  text "Thickness" at 4796.88,1117.5 h60
  text "Constant" at 5446.71,1117.5 h60
  text "Board Layer Stack" at 6016.58,1117.5 h60
  text "Top Overlay" at 2867.41,997.5 h60
  text "Top Solder" at 2867.41,877.5 h60
  text "SM-001" at 4197.03,877.5 h60
  text "1.00mil" at 4796.88,877.5 h60
  text "4" at 5446.71,877.5 h60
  text "Top Surface Finish" at 2867.41,757.5 h60
  text "PbSn" at 4197.03,757.5 h60
  text "0.79mil" at 4796.88,757.5 h60
  text "1" at 2457.5,637.5 h60
  text "Top Layer" at 2867.41,637.5 h60
  text "CF-004" at 4197.03,637.5 h60
  text "1.38mil" at 4796.88,637.5 h60
  text "Dielectric 1" at 2867.41,517.5 h60
  text "Core-043" at 4197.03,517.5 h60
  text "59.00mil" at 4796.88,517.5 h60
  text "4.3" at 5446.71,517.5 h60
  text "2" at 2457.5,397.5 h60
  text "Bottom Layer" at 2867.41,397.5 h60
  text "CF-004" at 4197.03,397.5 h60
  text "1.38mil" at 4796.88,397.5 h60
  text "Bottom Surface Finish" at 2867.41,277.5 h60
  text "PbSn" at 4197.03,277.5 h60
  text "0.79mil" at 4796.88,277.5 h60
  text "Bottom Solder" at 2867.41,157.5 h60
  text "SM-001" at 4197.03,157.5 h60
  text "1.00mil" at 4796.88,157.5 h60
  text "4" at 5446.71,157.5 h60
  text "Bottom Overlay" at 2867.41,37.5 h60
Top 3D Body:
  lines w8: 1455,970 ccw(c1473,970) 1473,952 1517,952 ccw(c1517,970) 1535,970 1535,1030 ccw(c1517,1030) 1517,1048 1473,1048 ccw(c1473,1030) 1455,1030 1455,970
Mechanical 15:
  lines w10: 190,100 60,100 0,160 0,940 60,1000 590,1000 ; 1810,100 1945,100 2000,155 2000,945 1945,1000 1810,1000
Drill Drawing:
  circle w10: c2445.62,1890.83 r33.33
  lines w10: 2412.29,1424.17 2428.96,1424.17 2428.96,1407.5 2462.29,1407.5 2462.29,1424.17 2478.96,1424.17 2478.96,1457.5 2462.29,1457.5 2462.29,1474.17 2428.96,1474.17 2428.96,1457.5 2412.29,1457.5 2412.29,1424.17 ; 2412.29,1557.5 2478.96,1557.5 2478.96,1624.17 2412.29,1624.17 2412.29,1557.5 ; 2412.29,1724.17 2428.96,1724.17 2445.62,1707.5 2462.29,1724.17 2478.96,1724.17 2462.29,1740.83 2478.96,1757.5 2462.29,1757.5 2445.62,1774.17 2428.96,1757.5 2412.29,1757.5 2428.96,1740.83 2412.29,1724.17 ; 2412.29,2007.5 2412.29,2024.17 2428.96,2040.83 2412.29,2057.5 2412.29,2074.17 2428.96,2074.17 2445.62,2057.5 2462.29,2074.17 2478.96,2074.17 2478.96,2057.5 2462.29,2040.83 2478.96,2024.17 2478.96,2007.5 2462.29,2007.5 2445.62,2024.17 2428.96,2007.5 2412.29,2007.5 ; 2412.29,2157.5 2445.62,2174.17 2478.96,2157.5 2462.29,2190.83 2478.96,2224.17 2445.62,2207.5 2412.29,2224.17 2428.96,2190.83 2412.29,2157.5 ; 2412.29,2307.5 2478.96,2307.5 2478.96,2374.17 2412.29,2374.17 2412.29,2307.5 ; 2412.29,2490.83 2445.62,2457.5 2478.96,2490.83 2445.62,2524.17 2412.29,2490.83 ; 2425.62,2320.83 2465.62,2320.83 2465.62,2360.83 2425.62,2360.83 2425.62,2320.83
  lines w15: 2352.5,1362.5 13193.48,1362.5 ; 2352.5,2562.5 13193.48,2562.5 ; 2903.38,1212.5 2903.38,2712.5 ; 3493.22,1212.5 3493.22,2712.5 ; 4642.88,1212.5 4642.88,2712.5 ; 5148.76,1212.5 5148.76,2712.5 ; 5882.56,1212.5 5882.56,2712.5 ; 7382.11,1212.5 7382.11,2712.5 ; 7971.96,1212.5 7971.96,2712.5 ; 8717.76,1212.5 8717.76,2712.5 ; 9627.5,1212.5 9627.5,2712.5 ; 10481.26,1212.5 10481.26,2712.5 ; 11814.87,1212.5 11814.87,2712.5 ; 2352.5,1212.5 13193.48,1212.5 13193.48,2712.5 2352.5,2712.5 2352.5,1212.5
  text "Symbol" at 2442.5,2607.5 h72
  text "Count" at 2948.38,2607.5 h72
  text "Hole Size" at 3538.22,2607.5 h72
  text "Plated" at 4687.88,2607.5 h72
  text "Hole Type" at 5193.76,2607.5 h72
  text "Drill Layer Pair" at 5927.56,2607.5 h72
  text "Via/Pad" at 7427.11,2607.5 h72
  text "Pad Shape" at 8016.96,2607.5 h72